# EAGLE board untitled (EAGLE 9.6.1)
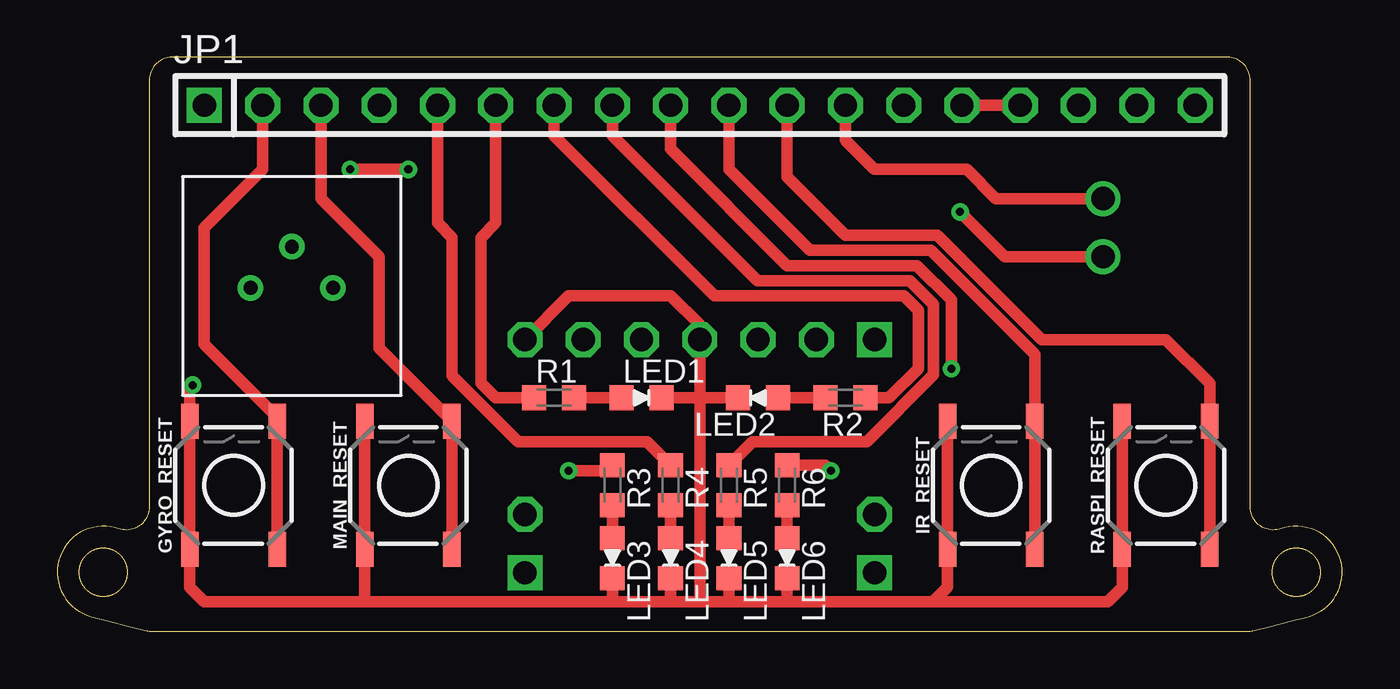
[diagram p0: board, top side]
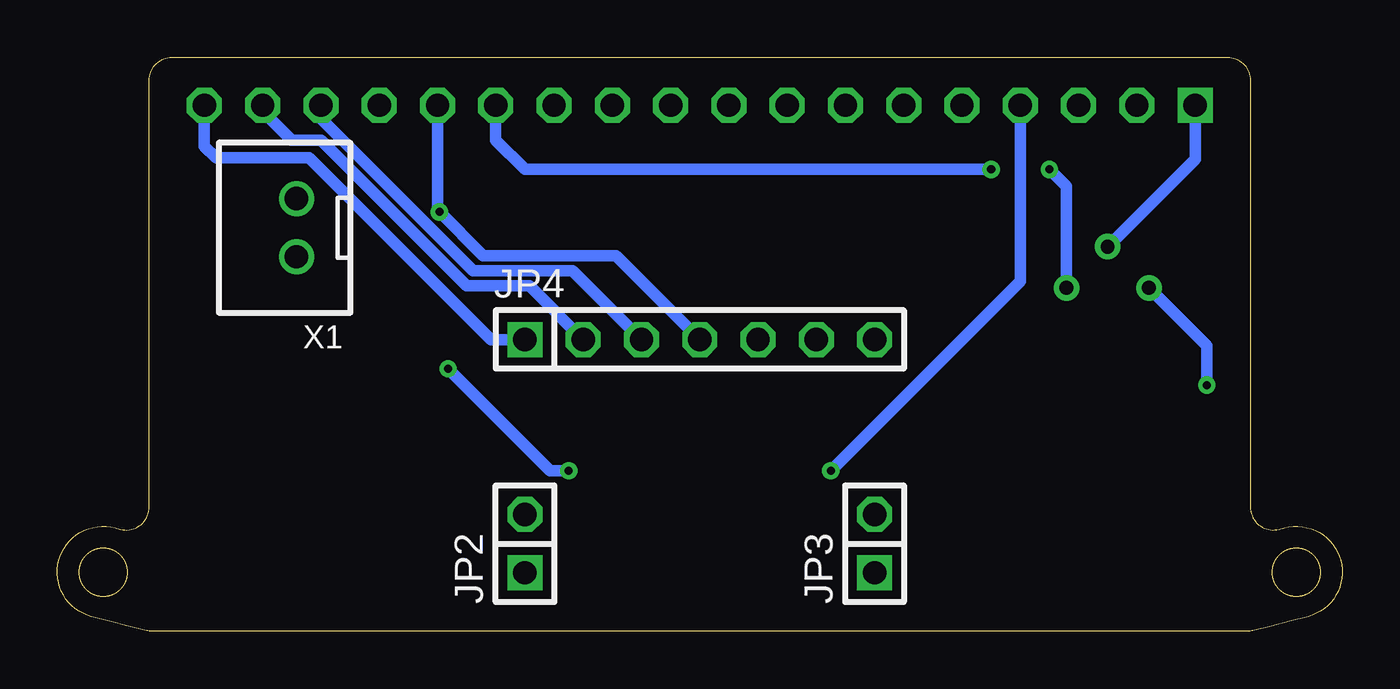
[diagram p1: board, bottom side, seen from below]

Size 56 x 25 mm. Coordinates in mm from the lower left corner, seen from the top.
Outline: 5,25 arc90 4,24 4,5.41 arc-105 2.74,4.44 arc0 2.51,4.5 arc180 1.48,0.64 arc1 3.88,0.03 arc14 4.12,0 51.88,0 arc14 52.11,0.03 arc1 54.51,0.64 arc180 53.48,4.5 arc0 53.25,4.44 arc-105 52,5.41 52,24 arc90 51,25 5,25
Outline: circle at 54,2.57 radius 1.05
Outline: circle at 2,2.57 radius 1.05
Copper layers (1*16): Top 0.035mm / dielectric 0.15mm / Bottom 0.035mm
Design rules "default": minimum track width 6mil, minimum drill 0.35mm, track to track 6mil, track to pad 6mil, pad to pad 6mil, via to via 6mil, smd to smd 6mil, copper to edge 40mil, drill to drill 6mil, minimum pad ring 10mil, minimum via ring 8mil, stop-mask expansion 4mil, vias tented up to drill 0mil, thermal gap 10mil

## Footprints (pad centres in the part's own frame; a part is rotated, then mirrored left to right if it is on the bottom)
TACTILE_SWITCH_SMD_5.2MM = smd 1.524 x 0.762: 1 -2.794,1.905; 2 2.794,1.905; 3 -2.794,-1.905; 4 2.794,-1.905
1X18 = drill 1.016 square: 1 -21.59,0 | drill 1.016 octagon: 2 -19.05,0; 3 -16.51,0; 4 -13.97,0; 5 -11.43,0; 6 -8.89,0; 7 -6.35,0; 8 -3.81,0; 9 -1.27,0; 10 1.27,0; 11 3.81,0; 12 6.35,0; 13 8.89,0; 14 11.43,0; 15 13.97,0; 16 16.51,0; 17 19.05,0; 18 21.59,0
1X02 = drill 1.016 square: 1 -1.27,0 | drill 1.016 octagon: 2 1.27,0
1X07 = drill 1.016 square: 1 -7.62,0 | drill 1.016 octagon: 2 -5.08,0; 3 -2.54,0; 4 0,0; 5 2.54,0; 6 5.08,0; 7 7.62,0
LED1608 = smd 1.05 x 1.08: A -0.875,0; K 0.875,0
SMD1608 = smd 1.05 x 1.08: 1 -0.875,0; 2 0.875,0
TRIM-3386K = drill 0.6: P$1 0,1.715; P$2 -1.796,-0.081; P$3 1.796,-0.081
JST-XH-02-PACKAGE-ROUND-PAD = drill 1.016: 1 -1.27,0; 2 1.27,0

## Placement (x,y rotation side)
GYRO_RESET  [TACTILE_SWITCH_SMD_5.2MM]  7.68,6.36 90 top
IR_RESET  [TACTILE_SWITCH_SMD_5.2MM]  40.7,6.36 90 top
JP1  [1X18]  28,22.91 0 top
JP2  [1X02]  35.62,3.81 90 bottom
JP3  [1X02]  20.38,3.81 90 bottom
JP4  [1X07]  28,12.71 0 bottom
LED1  LED1608  [LED1608]  25.46,10.16 0 top
LED2  LED1608  [LED1608]  30.54,10.16 180 top
LED3  LED1608  [LED1608]  24.19,3.18 270 top
LED4  LED1608  [LED1608]  26.73,3.18 270 top
LED5  LED1608  [LED1608]  29.27,3.18 270 top
LED6  LED1608  [LED1608]  31.81,3.18 270 top
MAIN_RESET  [TACTILE_SWITCH_SMD_5.2MM]  15.3,6.36 90 top
R1  [SMD1608]  21.65,10.16 0 top
R2  [SMD1608]  34.35,10.16 180 top
R3  [SMD1608]  24.19,6.36 270 top
R4  [SMD1608]  26.73,6.36 270 top
R5  [SMD1608]  29.27,6.36 270 top
R6  [SMD1608]  31.81,6.36 270 top
RASPI_RESET  [TACTILE_SWITCH_SMD_5.2MM]  48.32,6.36 90 top
U$1  TRIM-3386K  [TRIM-3386K]  10.22,15.04 0 top
X1  JST-XH-02-PIN-ROUND-PAD  [JST-XH-02-PACKAGE-ROUND-PAD]  45.57,17.58 90 bottom

## Library data of the parts
GYRO_RESET IR_RESET MAIN_RESET RASPI_RESET = SparkFun-Switches; PROD_ID: SWCH-08247; SF_SKU: COM-08720
JP1-JP4 = pinhead
LED1-LED6 R1-R6 = generic
U$1 = R-trim
X1 = Rembrandt Electronics - JST XH Connectors v1-0

## Nets
+3V3: JP1.13 U$1.P$3
CAM_STATUS: JP1.9 R6.1
D+: JP1.16 JP4.3
D-: JP1.17 JP4.2
GND: GYRO_RESET.1 GYRO_RESET.2 IR_RESET.1 IR_RESET.2 JP1.14 JP1.15 JP4.4 JP4.7 LED1.K LED2.K LED3.K LED4.K LED5.K LED6.K MAIN_RESET.1 MAIN_RESET.2 RASPI_RESET.1 RASPI_RESET.2 U$1.P$2 X1.1
GYRO_L: JP1.6 R1.1
GYRO_R: JP1.7 R2.1
GYRO_RESET: GYRO_RESET.3 GYRO_RESET.4 JP1.2
GYRO_STATUS: JP1.5 R4.1
IR_RESET: IR_RESET.3 IR_RESET.4 JP1.10
IR_STATUS: JP1.8 R5.1
LINE: JP1.4 R3.1
MAIN_RESET: JP1.3 MAIN_RESET.3 MAIN_RESET.4
N$1: LED1.A R1.2
N$2: LED2.A R2.2
N$3: LED3.A R3.2
N$4: LED4.A R4.2
N$5: LED5.A R5.2
N$6: LED6.A R6.2
RASPI_RESET: JP1.11 RASPI_RESET.3 RASPI_RESET.4
SWITCH: JP1.12 X1.2
TRIM: JP1.1 U$1.P$1
UVCC: JP1.18 JP4.1

## Tracks (layer width: path | path; a pad name or v marks a point on that pad's centre or on a via)
+3V3  (via drill 0.35)
  Top 0.508: v12.76,20.12 v15.3,20.12
  Bottom 0.508: U$1.P$3 12.01,19.38 v12.76,20.12 | v15.3,20.12 35.62,20.12 36.89,21.39 JP1.13
CAM_STATUS  (via drill 0.35)
  Top 0.508: R6.1 33.47,7.23 v33.71,6.99 | v38.97,11.44 38.97,14.44 37.47,15.93 31.81,15.93 26.73,21.01 JP1.9
  Bottom 0.508: v33.71,6.99 34.52,6.99 v38.97,11.44
D+
  Bottom 0.508: JP4.3 33.53,15.7 37.88,15.7 44.51,22.32 JP1.16
D-
  Bottom 0.508: JP4.2 35.41,15.04 38.16,15.04 44.51,21.39 45.78,21.39 47.05,22.66 JP1.17
GND  (via drill 0.35)
  Top 0.508: 38.16,1.28 38.79,1.91 IR_RESET.1 IR_RESET.2 | 38.16,1.28 31.81,1.28 | 31.81,1.28 29.27,1.28 | 29.27,1.28 28,1.28 | 28,1.28 26.73,1.28 | 26.73,1.28 24.19,1.28 | 24.19,1.28 13.39,1.28 | 13.39,1.28 6.41,1.28 5.77,1.91 GYRO_RESET.1 GYRO_RESET.2 5.77,10.6 v5.9,10.72 | 13.39,1.28 MAIN_RESET.1 MAIN_RESET.2 | LED3.K 24.19,1.28 | LED4.K 26.73,1.28 | LED5.K 29.27,1.28 | LED6.K 31.81,1.28 | LED1.K 28,10.16 | LED2.K 28,10.16 | 28,10.16 JP4.4 28,13.34 26.73,14.61 22.28,14.61 JP4.7 | 28,10.16 28,1.28 | RASPI_RESET.2 RASPI_RESET.1 46.41,1.91 45.78,1.28 38.16,1.28 | X1.1 41.3,16.31 v39.34,18.27 | JP1.14 JP1.15
  Bottom 0.508: JP4.4 31.65,16.36 37.44,16.36 v39.34,18.27 39.43,18.35 JP1.14 | v5.9,10.72 5.9,12.44 U$1.P$2
GYRO_L
  Top 0.508: R1.1 19.11,10.16 18.47,10.8 18.47,17.15 19.11,17.79 JP1.6
GYRO_R
  Top 0.508: R2.1 36.25,10.16 37.52,11.44 37.52,13.97 36.89,14.61 28.63,14.61 21.65,21.59 JP1.7
GYRO_RESET
  Top 0.508: GYRO_RESET.3 GYRO_RESET.4 9.58,9.32 6.41,12.5 6.41,17.58 8.95,20.12 JP1.2
GYRO_STATUS
  Top 0.508: R4.1 25.7,8.26 20.08,8.26 17.2,11.14 17.2,17.15 16.57,17.79 JP1.5
IR_RESET
  Top 0.508: IR_RESET.3 IR_RESET.4 42.6,12.07 38.08,16.59 32.8,16.59 29.27,20.12 JP1.10
IR_STATUS
  Top 0.508: R5.1 30.3,8.26 35.28,8.26 38.18,11.16 38.18,14.25 37.16,15.27 30.51,15.27 24.19,21.59 JP1.8
LINE  (via drill 0.35)
  Top 0.508: R3.1 23.95,6.99 v22.28,6.99
  Bottom 0.508: v22.28,6.99 14.03,15.25 JP1.4
MAIN_RESET
  Top 0.508: MAIN_RESET.3 MAIN_RESET.4 14.03,12.32 14.03,16.31 11.49,18.85 JP1.3
N$1
  Top 0.508: R1.2 LED1.A
N$2
  Top 0.508: LED2.A R2.2
N$3
  Top 0.508: R3.2 LED3.A
N$4
  Top 0.508: R4.2 LED4.A
N$5
  Top 0.508: R5.2 LED5.A
N$6
  Top 0.508: R6.2 LED6.A
RASPI_RESET
  Top 0.508: RASPI_RESET.3 RASPI_RESET.4 50.22,10.8 48.32,12.71 42.9,12.71 38.36,17.25 34.35,17.25 31.81,19.79 JP1.11
SWITCH
  Top 0.508: X1.2 40.9,18.85 39.63,20.12 35.62,20.12 34.35,21.39 JP1.12
TRIM
  Bottom 0.508: JP1.1 6.41,20.56 U$1.P$1
UVCC
  Bottom 0.508: JP1.18 49.59,21.14 49.08,20.63 45.02,20.63 37.09,12.71 JP4.1